# Altium PCB HC-SR04_v2_PCB.PcbDoc
Units mm, origin at the board's own origin, x right, y up, seen from the top; angles counter-clockwise.
Board outline 43.2 x 25 mm, 2 copper layers (Top Layer, Bottom Layer), stack 1.571 mm thick; 58 components, 42 nets, 166 pads, 57 vias.
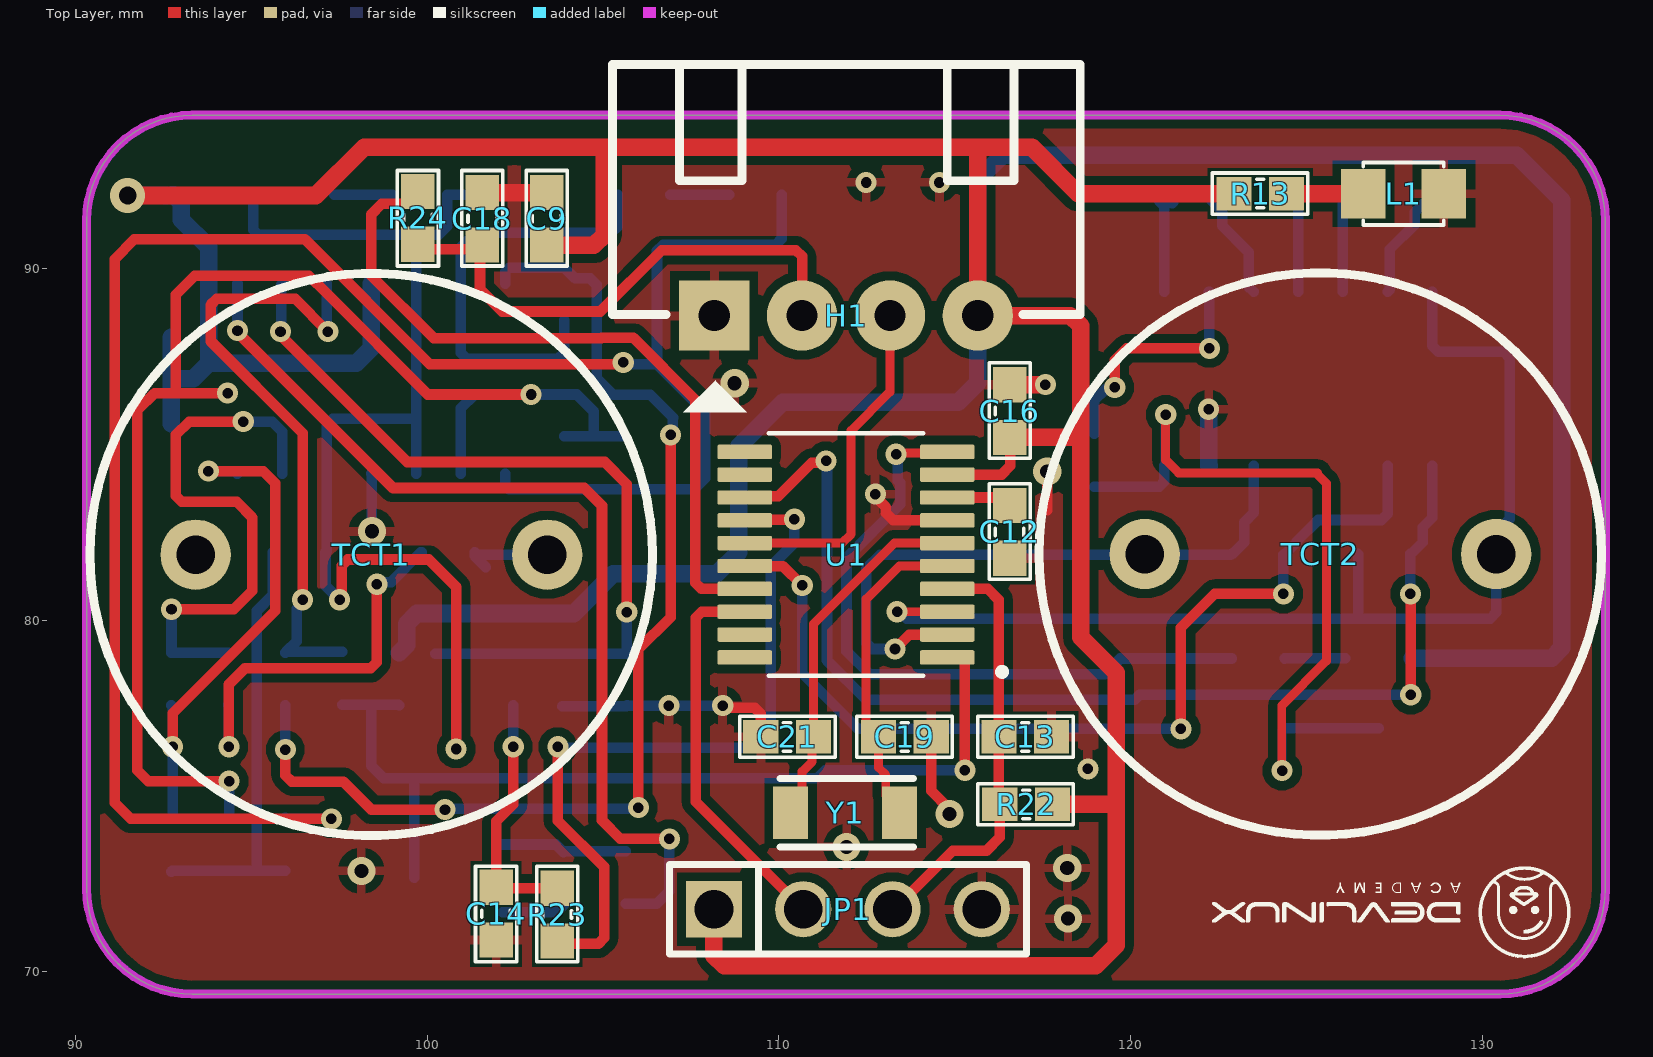
[diagram p0: Top Layer view]
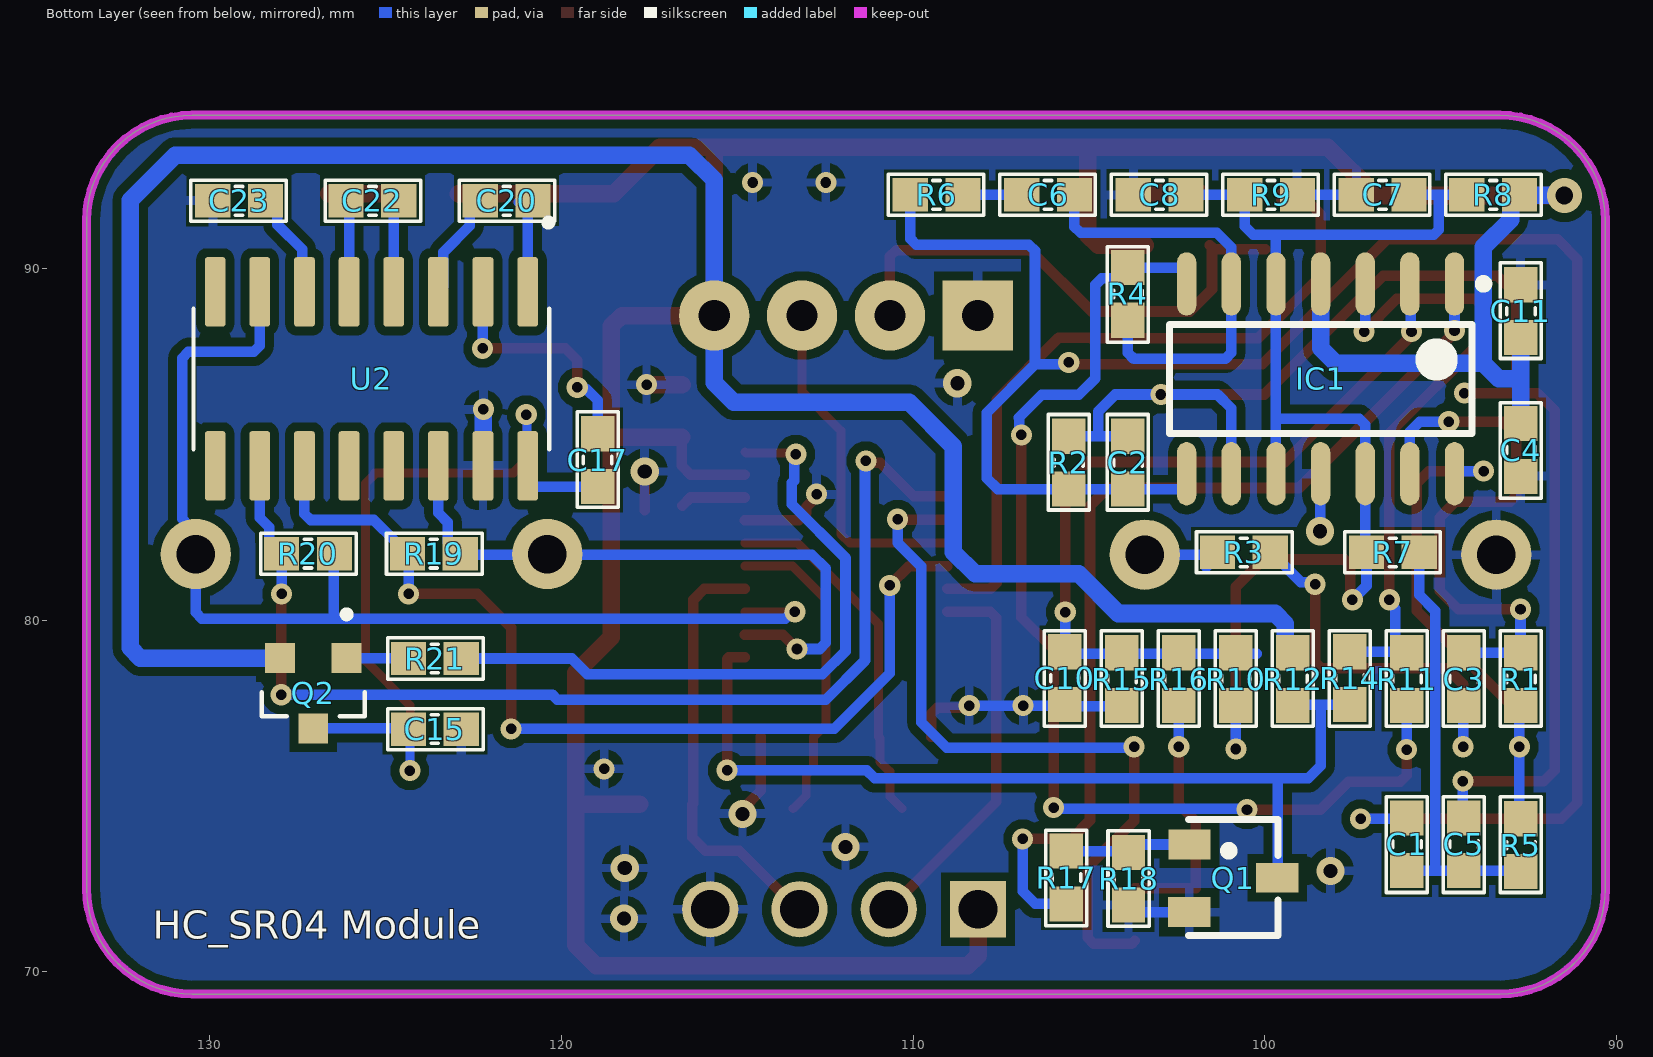
[diagram p1: Bottom Layer view, seen from below]
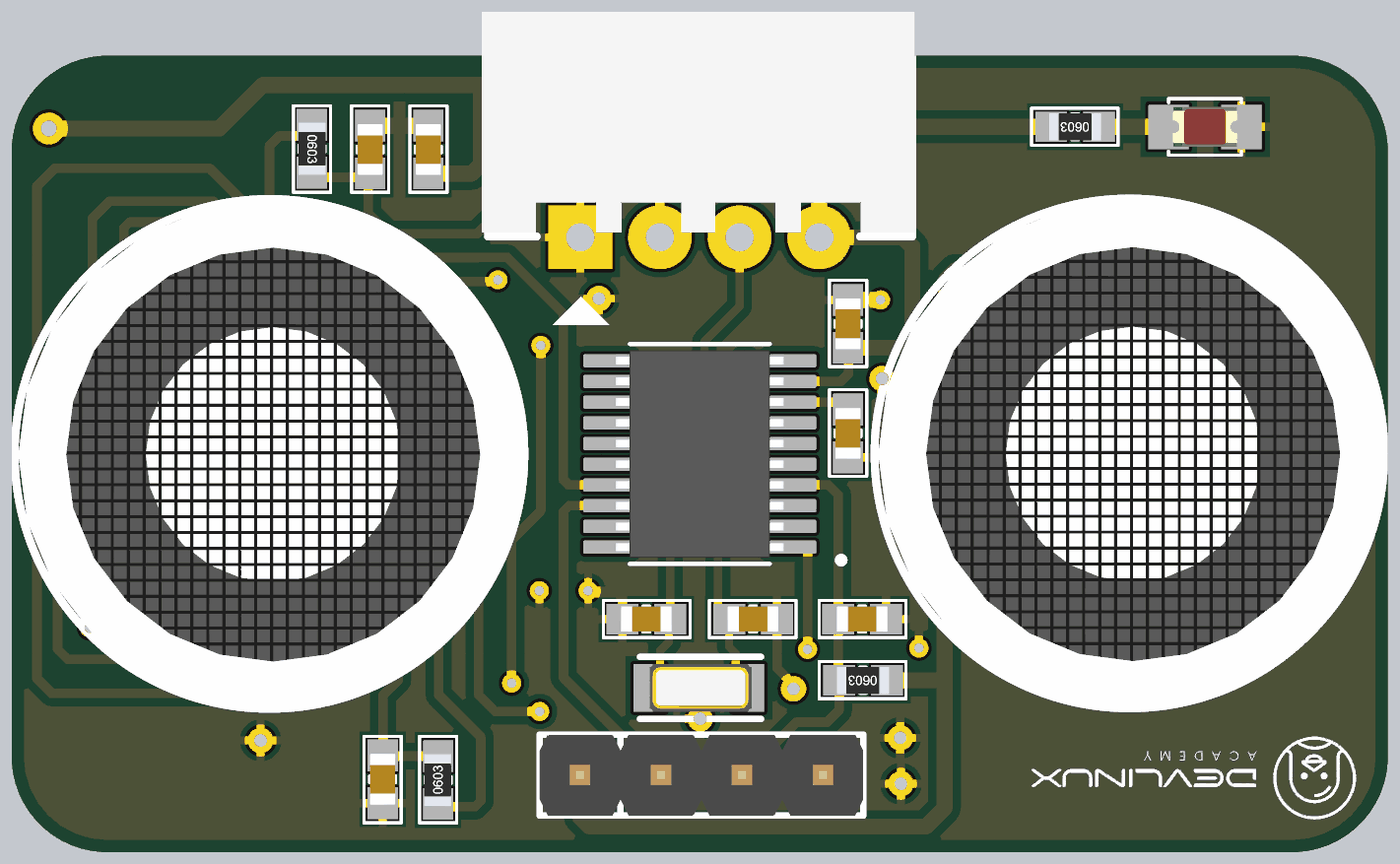
[diagram p2: 3D render of the assembled board from above, using the file's embedded part models]
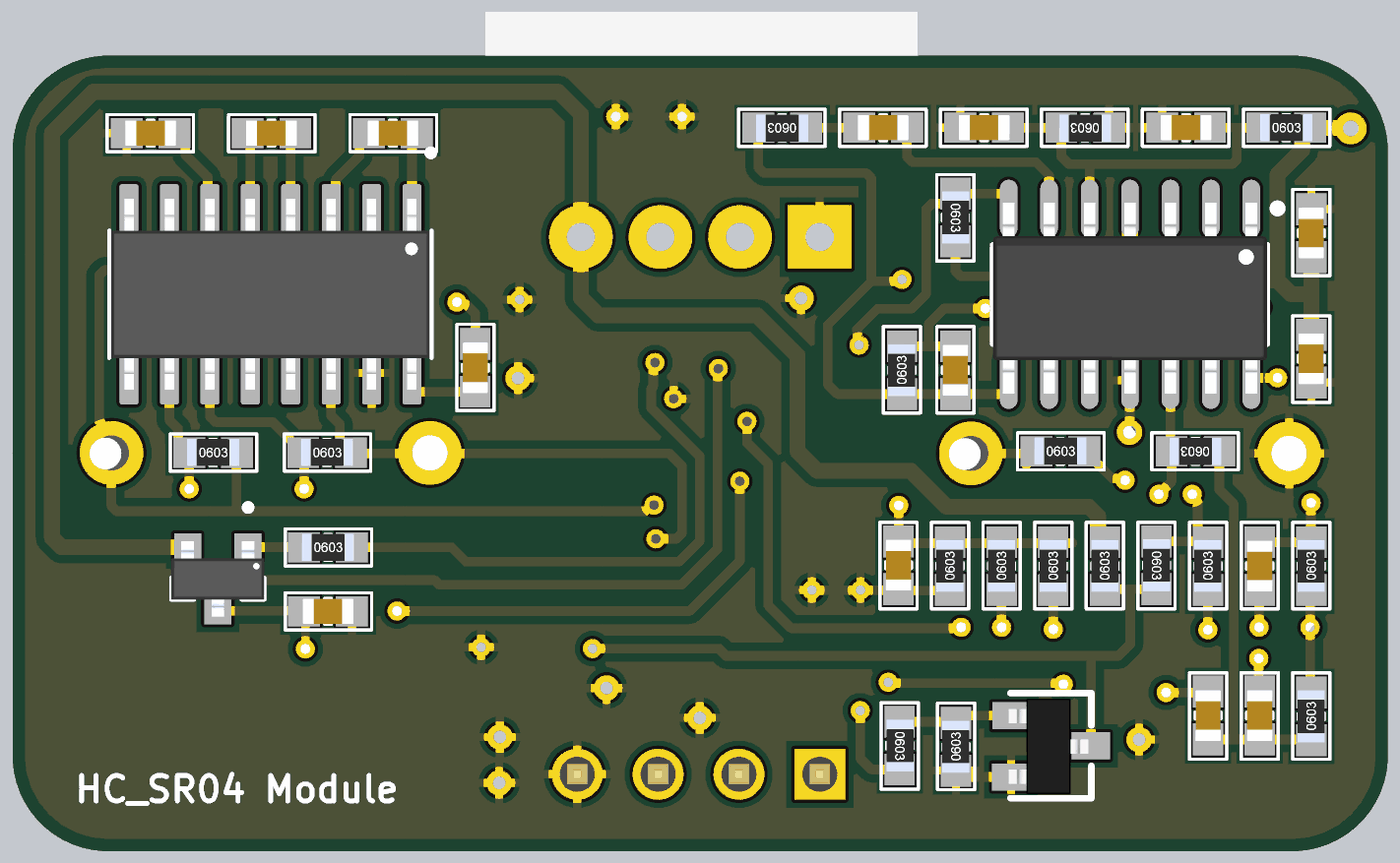
[diagram p3: 3D render of the assembled board from below, using the file's embedded part models]

## Layer stack, top to bottom
Top Solder: solder mask 0.0102, Solder Resist, Dk 3.5
Top Layer: signal copper 0.0356
Dielectric 1: dielectric 1.5, FR-4, Dk 4.8
Bottom Layer: signal copper 0.0356
Bottom Solder: solder mask 0.0102, Solder Resist, Dk 3.5

## Board outline
90.306,72.365 ccw(c93.306,72.365) 93.306,69.365 130.506,69.365 ccw(c130.506,72.365) 133.506,72.365 133.506,91.365 ccw(c130.506,91.365) 130.506,94.365 93.306,94.365 ccw(c93.306,91.365) 90.306,91.365

## Design rules (kind name [scope] priority, off if disabled: settings)
Clearance [All] p1: gap=0.254 ignorepadtopadclearanceinfootprint=FALSE except(0: Arc-Hole Track-Hole SMDPad-Hole THPad-Hole Via-Hole Fill-Hole Poly-Hole Region-Hole Text-Hole; 0.178: Arc-SMDPad Track-SMDPad SMDPad-SMDPad)
PolygonConnect [All] p1: connectstyle=Relief reliefconductorwidth=0.254 reliefentries=4 polygonreliefangle="90 Angle" airgapwidth=0.254
RoomDefinition HC-SR04_v2_SCH [InComponentClass('HC-SR04_v2_SCH')] p1: confinementstyle=ConfineIn formatcopy=TRUE lockcomponents=FALSE outline 178.943,26.924 487.172,26.924 487.172,45.212 178.943,45.212
RoutingVias [All] p1: holewidth=0.4 width=0.8 viastyle="Through Hole" minholewidth=0.3 minwidth=0.6 maxholewidth=0.5 maxwidth=1
SolderMaskExpansion [All] p1: expansion=0.102 istentingtop=FALSE
Width [All] p1: maxlimit=0.5 minlimit=0.254 preferedwidth=0.3
30 further rules are at their usual default settings.

## Components (designator, comment, footprint, x,y, rotation, side; value= is the part's Value field where it differs from the comment)
C1 "1nF" "tu 0603" 95.952,73.625 r270 bottom
C2 "12pF" "tu 0603" 103.89,84.48 r90 bottom
C3 "10nF" "tu 0603" 94.331,78.325 r90 bottom
C4 "100nF" "tu 0603" 92.71,84.84 r270 bottom
C5 "1nF" "tu 0603" 94.331,73.625 r270 bottom
C6 "10nF" "tu 0603" 106.158,92.1 r0 bottom
C7 "1.2uF" "tu 0603" 96.644,92.1 r0 bottom
C8 "150nF" "tu 0603" 102.987,92.1 r0 bottom
C9 "100nF" "tu 0603" 103.389,91.42 r90 top
C10 "10nF" "tu 0603" 105.68,78.351 r270 bottom
C11 "1.2uF" "tu 0603" 92.71,88.79 r90 bottom
C12 "1uF" "tu 0603" 116.56,82.51 r90 top
C13 "10nF" "tu 0603" 117.005,76.68 r0 top
C14 "10nF" "tu 0603" 101.952,71.652 r270 top
C15 "150nF" "tu 0603" 123.6,76.9 r180 bottom
C16 "100nF" "tu 0603" 116.56,85.948 r90 top
C17 "150nF" "tu 0603" 118.97,84.555 r90 bottom
C18 "10nF" "tu 0603" 101.559,91.42 r90 top
C19 "22pF" "tu 0603" 113.58,76.68 r180 top
C20 "150nF" "tu 0603" 121.56,91.93 r180 bottom
C21 "22pF" "tu 0603" 110.23,76.68 r0 top
C22 "150nF" "tu 0603" 125.378,91.93 r180 bottom
C23 "150nF" "tu 0603" 129.17,91.93 r0 bottom
H1 "4P 2.54" "Header 4P DC 2.54" 108.181,88.69 r90 top
IC1 "LM324 SOP14" "sop 14" 98.406,86.865 r270 bottom
JP1 "J_SWIM" "JP 1x4 DT" 108.15,71.78 r0 top
L1 "LED 0805" LED-0805-Red 126.624,92.13 r0 top
Q1 "BC847" SOT-23 100.89,72.68 r270 bottom value=C9014
Q2 "BC857A" TRANS_BC857A_RFG 127.06,77.92 r270 bottom
R1 "62k" "tro smd 0603" 92.71,78.325 r90 bottom
R2 "75k" "tro smd 0603" 105.57,84.48 r90 bottom
R3 "10k" "tro smd 0603" 100.59,81.93 r180 bottom
R4 "75k" "tro smd 0603" 103.89,89.28 r270 bottom
R5 "6.2k" "tro smd 0603" 92.71,73.6 r90 bottom
R6 "10k" "tro smd 0603" 109.33,92.1 r0 bottom
R7 "1k" "tro smd 0603" 96.35,81.93 r0 bottom
R8 "1k" "tro smd 0603" 93.497,92.1 r180 bottom
R9 "1k" "tro smd 0603" 99.815,92.1 r0 bottom
R10 "120k" "tro smd 0603" 100.816,78.325 r90 bottom
R11 "4.53k" "tro smd 0603" 95.952,78.325 r90 bottom
R12 "10k" "tro smd 0603" 99.195,78.325 r90 bottom
R13 "1k" "tro smd 0603" 123.69,92.135 r180 top
R14 "120k" "tro smd 0603" 97.574,78.351 r270 bottom
R15 "120k" "tro smd 0603" 104.059,78.325 r90 bottom
R16 "75k" "tro smd 0603" 102.437,78.325 r90 bottom
R17 "10k" "tro smd 0603" 105.64,72.68 r270 bottom
R18 "3.9k" "tro smd 0603" 103.87,72.645 r90 bottom
R19 "Spare R" "tro smd 0603" 123.63,81.89 r180 bottom
R20 "Spare R" "tro smd 0603" 127.21,81.89 r180 bottom
R21 "1k" "tro smd 0603" 123.6,78.91 r180 bottom
R22 "10k" "tro smd 0603" 117.03,74.76 r180 top
R23 "10k" "tro smd 0603" 103.692,71.626 r90 top
R24 "10k" "tro smd 0603" 99.73,91.445 r270 top
TCT1 "TCT40-16T/R" TCT40 98.406,81.865 r0 top
TCT2 "TCT40-16T/R" TCT40 125.4,81.88 r0 top
U1 "STM8S003F3P6" SOP65P640X120-20N 111.906,81.865 r180 top
U2 "MAX232AESET" SOIC127P600X175-16N 125.406,86.865 r270 bottom
Y1 "16MHz" "THACH ANH DAN 3215" 111.93,74.52 r0 top

## Footprints (in the part's own frame and the unit in brackets; to place one, negate y for a bottom-side part, rotate by r counter-clockwise, add the part's x,y. Pads: shape width x height; smd on the part's side, far side on the other; paste and mask are expansions set on the pad)
"Header 4P DC 2.54" [mil]
  rect 78.74x78.74 hole 35: 1(-1,1)
  round 78.74 hole 35: 2(-1,-97.43) 3(-1,-195.85) 4(-1,-294.28)
  silkscreen extent -110,-409 280,115, body extent 5,-413 278,123, height 290
"JP 1x4 DT" [mm] "4 pins, 1 row, straight, gold plating"
  rect 1.6x1.6 hole 1.1: 1(0,0)
  round 1.6 hole 1.1: 2(2.54,0) 3(5.08,0) 4(7.62,0)
  silkscreen extent -1.27,-1.27 8.89,1.27, body extent -1.27,-1.27 8.89,1.27, height 8.54
LED-0805-Red [mil]
  rect 50x55 smd: 1(0,0) 2(90,0)
  silkscreen extent 0,-35 90,35, body extent 5,-25 85,25, height 43
SOIC127P600X175-16N [mm]
  rrect25% 1.97x0.59 smd paste+0 mask+0.102: 1(-2.475,4.445) 2(-2.475,3.175) 3(-2.475,1.905) 4(-2.475,0.635) 5(-2.475,-0.635) 6(-2.475,-1.905) 7(-2.475,-3.175) 8(-2.475,-4.445) 9(2.475,-4.445) 10(2.475,-3.175) 11(2.475,-1.905) 12(2.475,-0.635) 13(2.475,0.635) 14(2.475,1.905) 15(2.475,3.175) 16(2.475,4.445)
  silkscreen extent -4.54,-5.06 2,5.13, body extent -3,-5 3,5, height 1.75
SOP65P640X120-20N [mm]
  rrect25% 1.56x0.41 smd: 1(-2.88,2.925) 2(-2.88,2.275) 3(-2.88,1.625) 4(-2.88,0.975) 5(-2.88,0.325) 6(-2.88,-0.325) 7(-2.88,-0.975) 8(-2.88,-1.625) 9(-2.88,-2.275) 10(-2.88,-2.925) 11(2.88,-2.925) 12(2.88,-2.275) 13(2.88,-1.625) 14(2.88,-0.975) 15(2.88,-0.325) 16(2.88,0.325) 17(2.88,0.975) 18(2.88,1.625) 19(2.88,2.275) 20(2.88,2.925)
  silkscreen extent -4.54,-3.45 2.2,3.45, body extent -3.2,-3.25 3.2,3.25, height 0.53
"sop 14" [mm] "SOIC, 14-Leads, Body 8.60x3.90mm, Pitch 1.27mm, IPC Medium Density"
  oval 1.8x0.55 smd: 1(-2.7,3.81) 2(-2.7,2.54) 3(-2.7,1.27) 4(-2.7,0) 5(-2.7,-1.27) 6(-2.7,-2.54) 7(-2.7,-3.81) 8(2.7,-3.81) 9(2.7,-2.54) 10(2.7,-1.27) 11(2.7,0) 12(2.7,1.27) 13(2.7,2.54) 14(2.7,3.81)
  silkscreen extent -2.82,-4.3 1.55,4.76, body extent -2.87,-4.3 3.13,4.3, height 1.75
SOT-23 [mm] "SOT 23 _ 1-3-2"
  rect 0.85x1.2 smd: 1(-0.94,-1.245) 2(0.985,-1.25) 3(0.005,1.25)
  silkscreen extent -1.65,-1.27 1.65,1.27, body extent -1.47,-1.33 1.53,1.17, height 1.06
TCT40 [mm]
  round 2 hole 1.1: 1(-5,0) 2(5,0)
  silkscreen extent -8.01,-8 7.99,8, body extent -7.89,-8.02 8.11,7.98, height 12
"THACH ANH DAN 3215" [mm] "Thach Anh Dan 5.08mm"
  rect 1x1.5 smd: 1(-1.6,0) 2(1.5,0)
  silkscreen extent -1.9,-0.98 1.9,0.97, body extent -1.6,-0.75 1.6,0.75, height 0.8
TRANS_BC857A_RFG [mm]
  rect 0.85x0.85 smd: 1(-1,0.95) 2(-1,-0.95) 3(1,0)
  silkscreen extent -2.35,-1.46 0.65,1.46, body extent -1.19,-1.46 1.19,1.46, height 1.12
"tro smd 0603" [mm] "Chip Capacitor, 2-Leads, Body 1,60x0,80mm, IPC Medium Density"
  rect 1x0.95 smd mask+0.076: 1(-0.75,0) 2(0.75,0)
  silkscreen extent -1.35,-0.58 1.37,0.58, body extent -0.82,-0.42 0.82,0.43, height 0.44
"tu 0603" [mm] "Chip Capacitor, 2-Leads, Body 1,60x0,80mm, IPC Medium Density"
  rect 1x0.95 smd mask+0.076: 1(-0.75,0) 2(0.75,0)
  silkscreen extent -1.35,-0.58 1.37,0.58, body extent -0.8,-0.4 0.8,0.4, height 0.9

## Part data
C1 C2 C4 C5 C6 C9 C10 C11 C12 C13 C14 C15 C16 C17 C18 C19 C20 C21 C22 C23: library part "Tu 0603 102 50V 10%", "Dán", Chung_Loai=Dán, Don_Vi=Con, Ma_Hang=MH004566, So_Chan=2, Ten_Linh_Kien="Tụ 0603 102-1nF 10% 50V"
C3: library part "Tu 0603 103 50V 10%", "Dán", Chung_Loai=Dán, Don_Vi=Con, Ma_Hang=MH004567, So_Chan=2, Ten_Linh_Kien="Tụ 0603 103-10nF 10% 50V"
C7 C8: library part "Tu 0603 104 50V 10%", "Dán", Chung_Loai=Dán, Don_Vi=Con, Ma_Hang=MH004568, So_Chan=2, Ten_Linh_Kien="Tụ 0603 104-100nF 10% 50V"
H1: library part "Header 4P 2.54 Duc Cong", "Cắm", Chung_Loai=Cắm, Don_Vi=Con, Ma_Hang=MH001310, Ten_Linh_Kien="Header 4P XH2.54-4P Đực Cong"
IC1: "Dán", Chung_Loai=Dán, Don_Vi=Con, Ma_Hang=MH002173, Ten_Linh_Kien="LM324 SOP14"
JP1: library part "JP 1x4 2.54 Duc Thang", "Cắm", Chung_Loai=Cắm, Don_Vi=Con, Ma_Hang=MH000903, Ten_Linh_Kien="Jump Đơn Đực 2.54MM 1x40P Thẳng 11MM"
L1: library part "LED 0805 Do", "Dán", Chung_Loai=Dán, Don_Vi=Con, Ma_Hang=MH000897, Ten_Linh_Kien="LED 0805 Màu Đỏ (Red)"
Q1: library part "Trans BC817", "SOT-23"
Q2: library part BC857A_RFG, "SOT-23, 200mW, PNP Bipolar Transistor", Package="SOT-23 Taiwan Semiconductor", Check_prices=https://www.snapeda.com/parts/BC857A%20RFG/Taiwan+Semiconductor/view-part/?ref=eda, MF="Taiwan Semiconductor", MP="BC857A RFG", SnapEDA_Link=https://www.snapeda.com/parts/BC857A%20RFG/Taiwan+Semiconductor/view-part/?ref=snap
R1 R2 R4 R5 R6 R7 R8 R9 R10 R11 R12 R13 R14 R15 R16 R17 R18 R19 R20 R21 R22 R23 R24: library part "Tro 0603 1% 1k", "Dán", Chung_Loai=Dán, Don_Vi=Con, Ma_Hang=MH006334, So_Chan=2, Ten_Linh_Kien="Trở 0603 1% 1k"
R3: library part "Tro 0603 1% 10k", "Dán", Chung_Loai=Dán, Don_Vi=Con, Ma_Hang=MH006333, So_Chan=2, Ten_Linh_Kien="Trở 0603 1% 10k"
TCT1 TCT2: "Piezoelectric Ceramic Ultrasonic Sensor"
U1: "STM8 series Microcontroller IC 8-Bit 16MHz 8KB (8K x 8) FLASH 20-TSSOP", Package="TSSOP-20 STMicroelectronics", Check_prices=https://www.snapeda.com/parts/STM8S003F3P6/STMicroelectronics/view-part/?ref=eda, MF=STMicroelectronics, MP=STM8S003F3P6, SnapEDA_Link=https://www.snapeda.com/parts/STM8S003F3P6/STMicroelectronics/view-part/?ref=snap
U2: "Dual Transmitter/Receiver RS-232 16-Pin SOIC N Tube", Package="SOIC-16 Maxim Integrated", Check_prices=https://www.snapeda.com/parts/MAX232AESE+/Analog+Devices/view-part/?ref=eda, MF="Analog Devices", MP=MAX232AESE+, SnapEDA_Link=https://www.snapeda.com/parts/MAX232AESE+/Analog+Devices/view-part/?ref=snap
Y1: library part "Thach Anh SMD 3225", "C700805", Chung_Loai=Dán, Don_Vi=Con, Ma_Hang=MH001979, Ten_Linh_Kien="Thạch Anh 16Mhz SMD5032"

## Via types
v1: diameter 0.6, hole 0.3, Top Layer to Bottom Layer, 48 vias
v2: diameter 0.8, hole 0.4, Top Layer to Bottom Layer, 8 vias
v3: diameter 1, hole 0.5, Top Layer to Bottom Layer, 1 vias

## Nets (pads, with @x,y where several pads share a name; then routed paths per layer and width w, separated by ;. In a path a pad name is that pad's centre, name@x,y a point inside that pad or via, vN(x,y) a via of type N, cw(c..) or ccw(c..) an arc to the next point about the centre after c; other vN are vias at no path point)
+5: C4.1 C9.1 C11.1 C16.1 H1.4 IC1.4 JP1.1 Q2.2 R8.2 R12.2 R13.2 R22.1 U1.9 | length 161
  Top Layer w0.3: U1.9 116.33,84.14 116.58,84.39 C16.1@116.58,85.198
  Top Layer w0.5: v3(91.47,92.08) 96.827,92.08 98.197,93.45 105.028,93.45 115.6,93.45 ; C9.1@103.389,90.662 104.735,90.662 105.028,90.955 105.028,93.39 ; JP1.1 108.15,70.463 108.443,70.17 119.01,70.17 119.59,70.75 119.59,74.76 ; C16.1@116.58,85.198 118.58,85.198 ; R22.1 119.59,74.76 ; R13.2 118.512,92.135 117.197,93.45 115.6,93.45 ; 115.6,93.45 115.656,93.394 H1.4 118.287,88.665 118.58,88.372 118.58,85.198 ; 118.58,85.198 118.58,79.51 119.59,78.5 119.59,74.76
  Bottom Layer w0.5: v3(91.47,92.08) 91.48,92.09 92.547,92.09 R8.2@92.557,92.08 ; C4.1 92.71,86.87 ; C11.1 92.71,86.87 ; R8.2 92.772,92.1 92.997,91.875 92.997,91.393 93.774,90.616 93.774,87.304 ; IC1.4 98.406,87.736 97.974,87.304 93.774,87.304 ; R12.2 99.409,79.289 99.409,79.897 99.702,80.19 104.16,80.19 105.29,81.32 108.232,81.32 108.85,81.938 108.85,84.94 110.11,86.2 115.1,86.2 115.656,86.756 H1.4 115.656,92.526 116.36,93.23 130.98,93.23 132.27,91.94 132.27,79.213 131.977,78.92 Q2.2 ; 92.71,86.87 93.34,86.87 93.774,87.304
A_OUT: C18.1 H1.2 R24.2 | length 14.7
  Top Layer w0.3: R24.2@99.98,90.545 C18.1@101.495,90.545 ; C18.1 101.495,90.605 101.495,89.415 102.13,88.78 104.92,88.78 106.664,90.524 110.48,90.524 110.656,90.348 H1.2
A_OUT_1: R24.1 U1.17 | length 20.6
  Top Layer w0.3: R24.1@99.53,92.13 99.53,91.97 99.405,91.845 98.705,91.845 98.4,91.54 98.4,89.8 100.174,88.026 104.949,88.026 104.958,88.035 105.86,88.035 107.62,86.275 107.62,81.066 107.796,80.89 U1.17
D_OUT: H1.3 U1.15 | length 9.8
  Top Layer w0.254: U1.15 111.79,82.19 112.05,82.45 112.05,85.39 113.156,86.496 H1.3
GND: C4.2 C7.2 C8.2 C9.2 C10.2 C11.2 C12.1 C13.2 C14.2 C15.2 C16.2 C18.2 C19.1 C21.1 C23.2 H1.1 IC1.11 JP1.4 L1.2 Q1.2 R9.1 R15.1 R18.1 TCT1.1 U1.7 U2.15 | length 21.8
  Top Layer w0.3: v1@108.4,77.51 109.304,77.51 109.48,77.334 C21.1 ; v2(111.92,73.55) v2@111.94,73.53 ; v1(112.74,83.584) 112.74,83.519 113.041,83.218 113.041,83.052 113.253,82.84 U1.7 ; C19.1 114.33,75.145 114.85,74.625 v2(114.85,74.49) ; 117.63,83.13 v2(117.63,84.23) ; v2@118.22,71.48 v2(118.22,71.51)
  Top Layer w0.5: C18.2@101.849,92.162 C9.2@103.389,92.162 ; C16.2 117.578,86.698 v1(117.58,86.7)
  Bottom Layer w0.3: C7.2@97.345,92.1 R9.1@98.993,92.1 ; IC1.11 98.42,84.151 98.413,84.144 98.413,82.537 v2(98.42,82.53) ; Q1.2 103.67,71.695 R18.1 ; R15.1@103.831,77.55 105.655,77.55 105.68,77.575 105.685,77.57 108.34,77.57 v1@108.37,77.54 ; H1.1@108.114,88.757 H1.1@108.181,88.69
  Bottom Layer w0.5: v1(122.22,86) 122.22,84.401 U2.15
  other v1: 118.786,75.77 106.87,77.57 108.4,77.57 112.48,92.45 114.56,92.45
  other v2: 98.12,72.87 118.2,72.95 108.74,86.74
IN1+: IC1.3 R11.2 R14.1 | length 17.9
  Top Layer w0.3: v1(96.45,80.58) 96.45,85.32 93.83,87.94 93.83,88.964 94.006,89.14 96.24,89.14 v1(97.17,88.21)
  Bottom Layer w0.3: R11.2 R11.2@95.978,79.101 ; v1(96.45,80.58) 96.45,80.499 96.277,80.326 96.277,79.4 R11.2@95.978,79.101 ; v1@97.136,88.21 IC1.3 ; R14.1 R11.2@95.978,79.101
IN1-: C10.1 IC1.2 R10.2 R15.2 R16.2 | length 23.4
  Top Layer w0.3: v1@95.82,88.11 99.43,84.5 105.04,84.5 105.67,83.87 v1(105.67,80.23)
  Bottom Layer w0.3: v1@95.82,88.11 95.843,88.133 95.843,89.542 IC1.2 ; 100.22,79.04 101.982,79.04 103.831,79.04 105.655,79.04 105.68,79.065 105.67,79.075 v1(105.67,80.23)
  other v1: 95.82,88.21
IN2+: C7.1 C8.1 IC1.5 IC1.10 IC1.12 R7.2 R8.1 R9.2 R10.1 | length 35.8
  Top Layer w0.3: v1(97.5,80.58) 97.557,80.637 97.557,81.55 97.733,81.726 100.034,81.726 100.816,80.944 v1(100.816,76.336)
  Bottom Layer w0.3: R8.1 95.046,92.1 ; C7.1@95.845,92.1 95.046,92.1 ; v1(97.5,80.58) 97.1,80.98 R7.2 97.136,81.966 IC1.12 97.136,85.554 97.312,85.73 99.666,85.73 99.678,85.718 ; IC1.10 99.676,85.712 99.68,85.716 99.678,85.718 ; v1(100.816,76.336) R10.1 ; C8.1@102.09,92.1 R9.2 100.565,91.203 100.323,90.96 99.676,90.96 ; 95.046,92.1 95.046,91.104 95.19,90.96 99.676,90.96 ; 99.676,90.96 IC1.5 99.678,89.563 99.678,85.718
IN2-: C6.1 IC1.6 R4.2 | length 12.6
  Bottom Layer w0.3: R4.2 103.89,87.606 103.714,87.43 101.122,87.43 100.946,87.606 IC1.6 100.951,89.57 100.951,90.611 101.36,91.02 105.233,91.02 105.408,91.196 C6.1
IN3-: C2.2 C5.1 IC1.9 R2.2 | length 39.7
  Top Layer w0.3: v1(94.317,86.457) 92.84,86.457 ; v1(94.36,75.42) 92.06,75.42 91.75,75.73 91.75,85.97 92.237,86.457 92.84,86.457 ; v1(102.947,86.42) 100.008,86.42 97.134,89.294 96.628,89.8 93.38,89.8 92.84,89.26 92.84,86.457
  Bottom Layer w0.3: C5.1 94.36,74.404 v1(94.36,75.42) ; IC1.9 100.946,86.026 101.34,86.42 v1(102.947,86.42) 104.246,86.42 104.73,85.936 104.73,85.23 ; C2.2 104.73,85.23 ; R2.2 104.73,85.23
IN4-: C3.2 IC1.13 R1.2 | length 16.1
  Top Layer w0.3: v1(92.72,80.31) 94.49,80.31 95.02,80.84 95.02,82.92 94.574,83.366 93.016,83.366 92.84,83.542 92.84,85.27 93.22,85.65 v1(94.76,85.65)
  Bottom Layer w0.3: R1.2@92.71,79.07 R1.2@92.715,79.075 ; R1.2 R1.2@92.715,79.075 ; v1(92.72,80.31) 92.72,79.08 R1.2@92.715,79.075 ; C3.2 R1.2@92.715,79.075 ; v1(94.76,85.65) 95.58,85.65 95.866,85.364 IC1.13
NetC1_2: C1.2 C5.2 R5.1 R7.1 | length 12.5
  Bottom Layer w0.3: R5.1 92.735,72.875 C5.2 95.142,72.875 ; R7.1 95.6,80.72 95.142,80.262 95.142,72.875 ; C1.2 95.142,72.875
NetC3_1: C3.1 R3.2 | length 11.3
  Top Layer w0.3: v1(94.35,76.4) 94.35,78.17 94.81,78.63 98.384,78.63 98.56,78.806 v1(98.56,81.022)
  Bottom Layer w0.3: C3.1 94.35,77.557 v1(94.35,76.4) v1@94.35,76.37 ; v1(98.56,81.022) 98.617,81.079 98.964,81.079 99.815,81.93 R3.2
NetC6_2: C6.2 R6.1 | length 1.7
  Bottom Layer w0.3: C6.2 R6.1
NetC15_1: C15.1 C17.1 Q2.3 U2.16 | length 22.7
  Top Layer w0.254: v1(121,85.846) 121,84.56 121.37,84.19 125.32,84.19 125.32,84.14 125.57,83.89 125.57,78.84 124.3,77.57 124.3,75.73 v1(124.31,75.72)
  Bottom Layer w0.254: U2.16 120.98,84.409 120.98,85.827 v1(121,85.846) ; v1(124.31,75.72) 124.31,76.86 C15.1@124.37,76.92
  Bottom Layer w0.3: C17.1@118.97,83.8 120.816,83.8 120.961,83.945 U2.16 ; C15.1@124.37,76.92 Q2.3
NetC17_2: C17.2 U2.2 | length 6.9
  Top Layer w0.3: v1(119.55,86.62) 119.55,87.39 119.89,87.73 v1(122.24,87.73)
  Bottom Layer w0.3: C17.2 118.97,86.255 119.278,86.563 119.493,86.563 v1(119.55,86.62) ; U2.2 122.236,89.336 122.236,87.734 v1(122.24,87.73)
NetC20_1: C20.1 U2.3 | length 3.1
  Bottom Layer w0.3: C20.1 122.606,91.634 122.606,91.214 123.356,90.464 123.356,89.485 U2.3
NetC20_2: C20.2 U2.1 | length 2.7
  Bottom Layer w0.3: C20.2 120.961,91.779 U2.1 ; C20.2@121.191,91.861 C20.2@121.22,91.89
NetC22_1: C22.1 U2.5 | length 2.6
  Bottom Layer w0.3: U2.5 126.041,91.843 C22.1
NetC22_2: C22.2 U2.4 | length 2.6
  Bottom Layer w0.3: C22.2 124.771,91.787 U2.4
NetC23_1: C23.1 U2.6 | length 3.1
  Bottom Layer w0.3: U2.6 127.377,89.406 127.377,90.547 128.084,91.254 128.084,91.605 128.409,91.93 C23.1
NetL1_1: L1.1 R13.1 | length 2.2
  Top Layer w0.5: R13.1 124.443,92.133 126.622,92.133 L1.1
NetQ1_1: Q1.1 R17.1 R18.2 | length 3.6
  Bottom Layer w0.3: Q1.1 103.645,73.62 R18.2 103.905,73.43 R17.1
NetQ2_1: Q2.1 R21.1 | length 1.7
  Bottom Layer w0.3: R21.1@124.38,78.91 124.39,78.92 Q2.1
NetR3_1: R3.1 TCT1.2 | length 2.6
  Bottom Layer w0.3: R3.1@101.34,81.83 R3.1@101.665,81.505 ; R3.1 101.405,81.865 TCT1.2
NRST: C13.1 JP1.3 R22.2 U1.4 | length 12.3
  Top Layer w0.3: JP1.3 113.275,71.78 114.937,73.443 115.903,73.443 116.28,73.82 R22.2 116.255,74.785 116.255,80.575 115.94,80.89 U1.4
OSC_IN: C19.2 U1.5 Y1.2 | length 9
  Top Layer w0.254: Y1.2@113.41,74.64 113.037,75.013 113.037,75.603 112.83,75.81 C19.2 112.828,76.68 112.48,77.028 112.48,80.6 113.42,81.54 U1.5
OSC_OUT: C21.2 U1.6 Y1.1 | length 10.3
  Top Layer w0.254: Y1.1@110.31,74.64 110.66,74.99 110.66,75.69 110.943,75.973 110.943,76.643 C21.2 110.98,79.89 113.28,82.19 U1.6
OUT1: IC1.1 R17.2 | length 27.8
  Top Layer w0.3: v1(94.598,88.238) 94.598,88.182 99.02,83.76 104.46,83.76 104.966,83.254 104.966,74.304 105.49,73.78 v1(106.88,73.78)
  Bottom Layer w0.3: IC1.1 94.597,89.564 v1@94.597,88.239 ; R17.2 106.524,71.93 106.88,72.286 v1(106.88,73.78) ; v1@94.597,88.239 v1(94.598,88.238)
OUT2: IC1.7 R4.1 R11.1 | length 32.5
  Top Layer w0.3: v1(95.96,76.32) 95.96,75.586 96.136,75.41 97.609,75.41 98.409,74.61 v1(100.5,74.61) ; v1(106,74.67) 106,79.17 106.916,80.086 v1(106.916,85.27)
  Bottom Layer w0.3: R11.1 95.96,77.568 v1(95.96,76.32) ; v1(100.5,74.61) 100.53,74.64 105.97,74.64 v1(106,74.67) ; IC1.7 102.216,89.915 102.331,90.03 R4.1 104.2,89.72 104.634,89.72 104.81,89.544 104.81,86.88 105.282,86.408 106.342,86.408 106.99,85.76 106.974,85.744 106.974,85.327 v1(106.916,85.27)
OUT3: C1.1 C2.1 IC1.8 R2.1 R6.2 | length 58.5
  Top Layer w0.3: v1(97.27,74.35) 91.56,74.35 91.1,74.81 91.1,90.27 91.66,90.83 96.517,90.83 100.071,87.276 105.514,87.276 v1(105.569,87.331)
  Bottom Layer w0.3: C1.1 95.978,74.35 v1(97.27,74.35) ; IC1.8 102.216,83.845 102.331,83.73 C2.1 107.59,83.73 107.9,84.04 107.9,85.906 106.53,87.276 ; v1(105.569,87.331) 105.624,87.276 106.53,87.276 ; R6.2 110.08,90.856 109.904,90.68 106.706,90.68 106.53,90.504 106.53,87.276
OUT4: IC1.14 R1.1 R5.2 | length 14.9
  Top Layer w0.3: v1(92.75,76.4) 92.75,77.353 95.67,80.273 95.67,83.894 95.324,84.24 v1(93.77,84.24)
  Bottom Layer w0.3: R5.2 92.75,74.39 v1(92.75,76.4) 92.75,77.535 R1.1 ; v1(93.77,84.24) 94.521,84.24 IC1.14
PWM: R23.1 U1.14 | length 21.2
  Top Layer w0.3: R23.1 103.778,70.79 104.854,70.79 105.03,70.966 105.03,72.98 103.71,74.3 v1@103.71,76.37 ; U1.14 109.042,82.855 110.424,82.855 v1(110.44,82.871)
  Bottom Layer w0.3: v1@103.71,76.37 109.044,76.37 109.768,77.094 109.768,81.528 110.44,82.2 v1(110.44,82.871)
  other v1: 103.71,76.4
PWR_ON: R21.2 U1.10 | length 19.2
  Top Layer w0.254: v1(113.33,84.72) 113.365,84.755 114.751,84.755 U1.10
  Bottom Layer w0.3: v1(113.33,84.72) 113.383,84.667 113.383,83.97 113.444,83.909 113.444,83.292 111.92,81.768 111.92,79.12 112.58,78.46 119.26,78.46 119.71,78.91 R21.2@122.88,78.91
SET1: R19.2 TCT2.1 U1.2 U2.14 | length 18
  Top Layer w0.3: v1(113.3,79.18) 113.71,79.59 U1.2
  Bottom Layer w0.3: v1(113.3,79.18) 112.656,79.18 112.48,79.356 112.48,81.47 112.875,81.865 120.406,81.865 122.855,81.865 R19.2 122.905,81.89 123.23,82.215 123.23,82.78 123.501,83.051 U2.14
SET2: R20.2 TCT2.2 U1.3 U2.7 | length 31.3
  Top Layer w0.254: v1@113.4,80.24 U1.3
  Top Layer w0.3: v1(113.36,80.24) v1@113.4,80.24
  Bottom Layer w0.3: v1(113.36,80.24) 113.441,80.24 113.635,80.046 126.472,80.046 130.23,80.046 130.406,80.222 TCT2.2@130.406,81.865 ; R20.2 126.472,81.878 126.472,80.07 ; U2.7 128.581,87.806 128.757,87.63 130.614,87.63 130.79,87.454 130.79,82.891 130.731,82.832 TCT2.2@130.731,82.19
SIG: Q1.3 R12.1 R14.2 U1.1 | length 27
  Top Layer w0.3: U1.1 115.235,78.94 115.29,78.885 v1(115.29,75.73)
  Bottom Layer w0.3: R14.2 98.4,77.601 ; R12.1 99.17,77.601 98.4,77.601 ; Q1.3@99.63,72.675 99.63,75.5 ; v1(115.29,75.73) 111.322,75.73 111.092,75.5 99.63,75.5 ; 98.4,77.601 98.4,75.86 98.76,75.5 99.63,75.5
SWIM: JP1.2 U1.18 | length 11
  Top Layer w0.3: U1.18 107.806,80.24 107.63,80.064 107.63,74.84 JP1.2
THD: C14.1 R16.1 R23.2 | length 7.1
  Top Layer w0.3: v1(102.44,76.4) 102.44,74.76 101.962,74.282 101.962,72.376 R23.2
  Bottom Layer w0.3: R16.1 102.44,77.573 v1(102.44,76.4)
TX1: R19.1 U1.16 U2.11 | length 27.9
  Top Layer w0.3: U1.16 110.112,81.54 v1(110.662,80.99) ; v1(121.43,76.91) 121.43,79.79 122.39,80.75 v1(124.35,80.75)
  Bottom Layer w0.3: v1(110.662,80.99) 110.662,78.488 112.24,76.91 v1(121.43,76.91) ; v1(124.35,80.75) 124.35,81.86 R19.1 124.405,81.89 124.73,82.215 124.73,82.24 125.34,82.85 127.135,82.85 127.311,83.026 U2.11
TX2: R20.1 U1.13 U2.10 | length 32.3
  Top Layer w0.3: U1.13 109.065,83.529 109.978,83.529 110.929,84.48 111.29,84.48 v1(111.34,84.53) ; v1(127.96,80.75) 127.965,80.745 127.965,77.885 v1(127.97,77.88)
  Bottom Layer w0.3: v1(111.34,84.53) 111.366,84.504 111.366,78.854 112.48,77.74 120.114,77.74 120.254,77.88 v1(127.97,77.88) ; v1(127.96,80.75) R20.1 127.985,81.89 128.31,82.215 128.31,82.64 128.581,82.911 U2.10
VCAP: C12.2 U1.8 | length 1.9
  Top Layer w0.3: U1.8 116.33,83.49 C12.2
pads on no net: U1.11 U1.12 U1.19 U1.20 U2.8 U2.9 U2.12 U2.13

## Polygon pours and split planes (outlines as drawn)
GND on Top Layer "GND_L01_P000" (solid, remove dead copper, pour order 0): 84.07,114.54 137.39,114.54 141.63,110.3 140.86,109.53 140.86,66.15 88.92,66.15 86.93,64.16
GND on Bottom Layer "GND_L02_P001" (solid, remove dead copper, pour order 1): 84.33,115.06 86.15,113.24 139.47,113.24 139.47,66.07 139.21,65.81 138.35,66.67 87.45,66.67

## Keep-outs
Keep-Out Layer:
  the board outline again, w0.254

## Silkscreen, mask and mechanical layers (free items; w line width, h text height)
Top Overlay:
  drawing of 21 lines, arcs and shapes, not listed
Bottom Overlay:
  text "HC_SR04 Module" at 131.63,70.933 h0.8
Mechanical 13:
  lines w0.254: 93.406,81.865 103.406,81.865 ; 98.406,81.865 98.406,86.865 ; 120.406,81.865 130.406,81.865 ; 125.406,81.865 125.406,86.865